# EAGLE board Rudder - Prototype 2 (EAGLE 7.2.0)
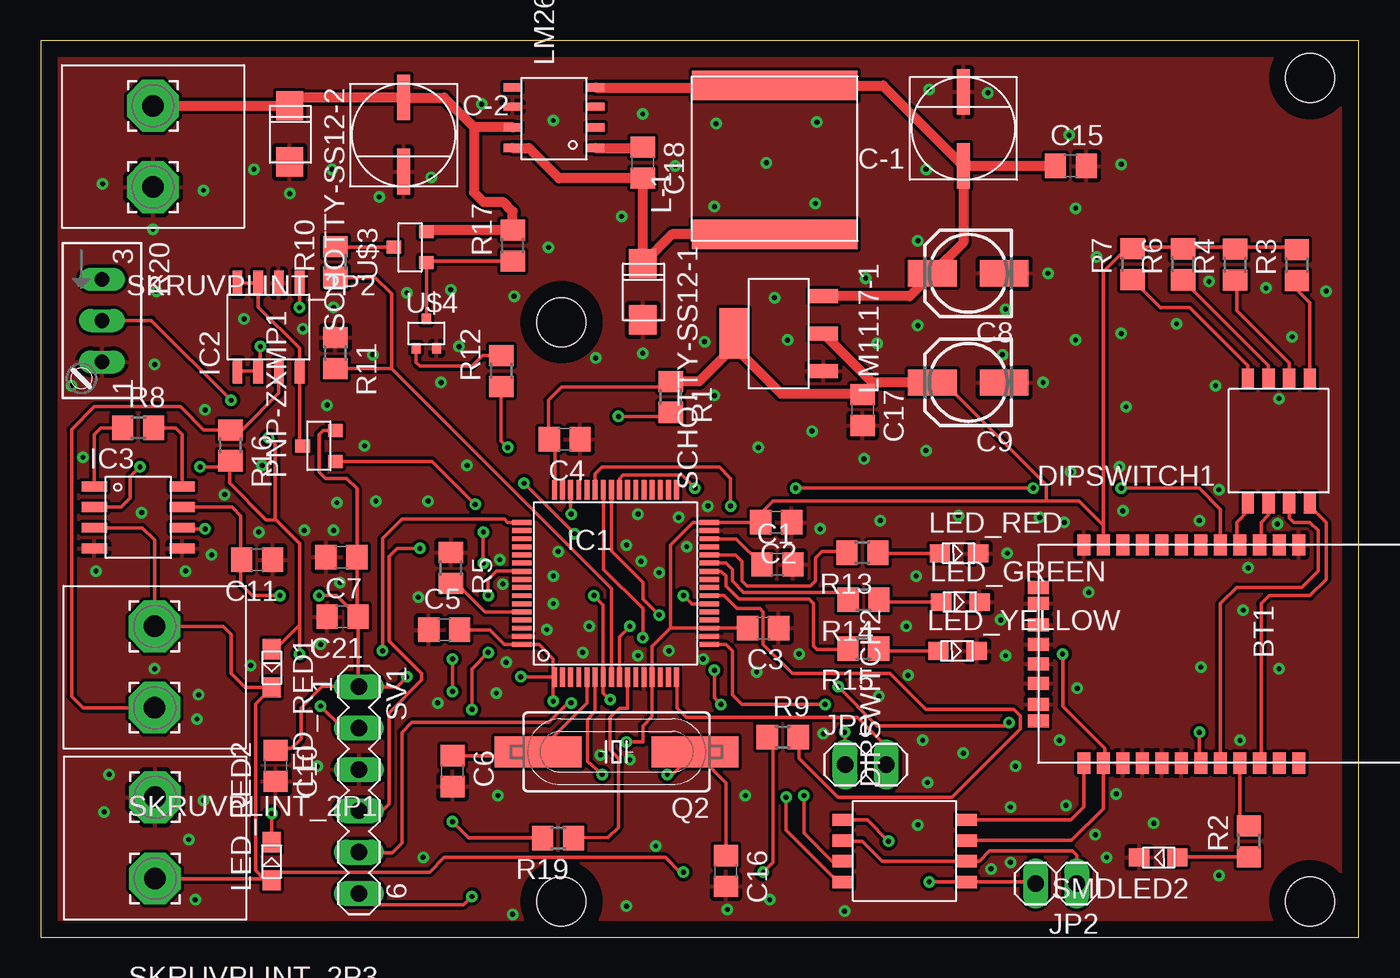
[diagram p0: board, top side]
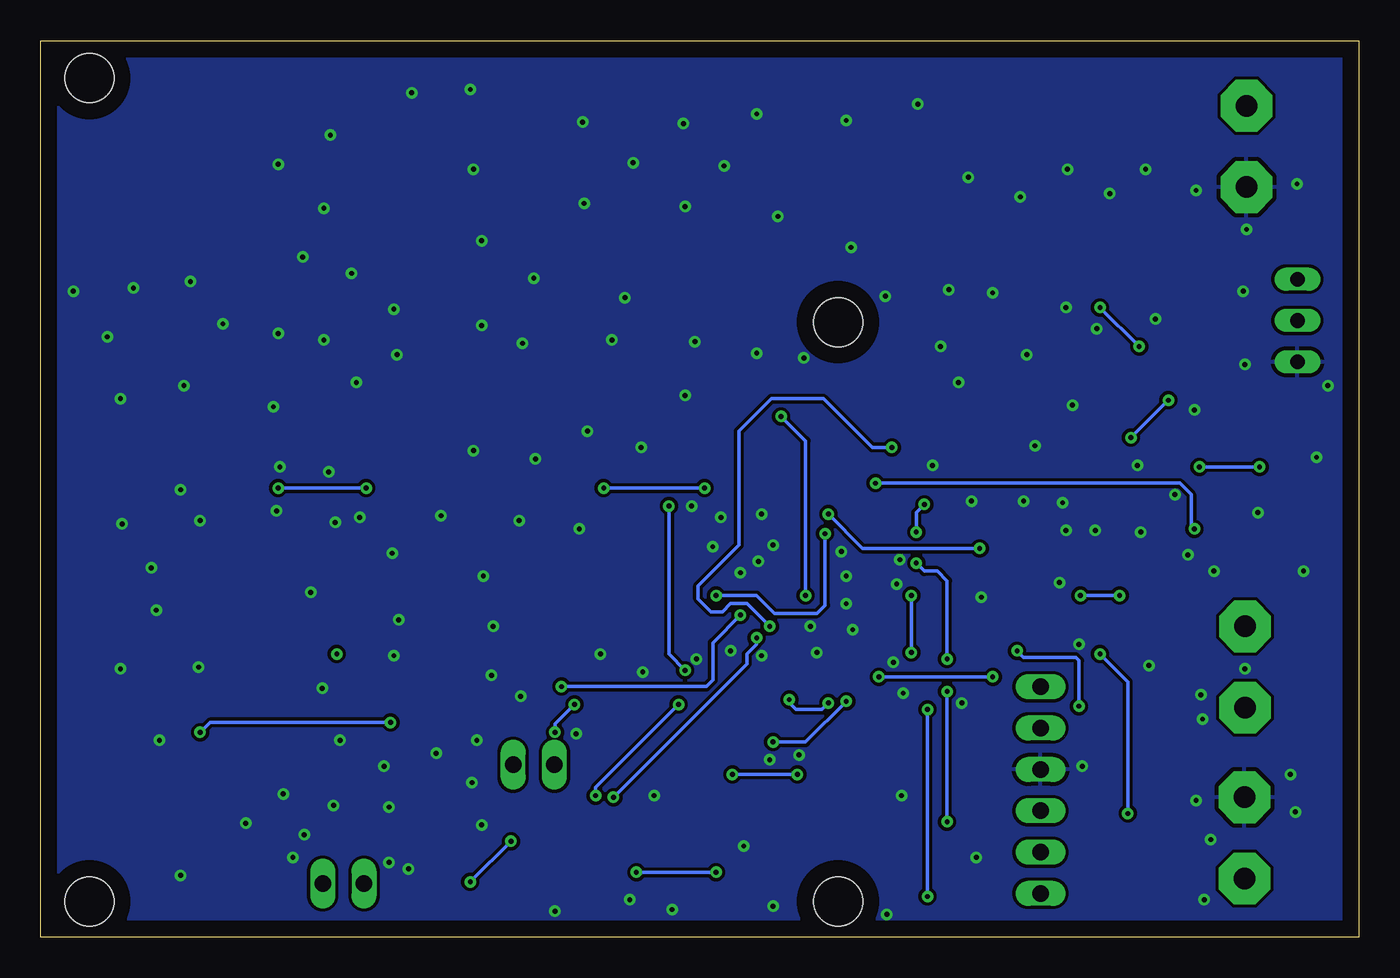
[diagram p1: board, bottom side, seen from below]

Size 81 x 55.1 mm. Coordinates in mm from the lower left corner, seen from the top.
Outline: 0,0 81,0 81,55.1 0,55.1 0,0
Copper layers (1*16): Top 0.035mm / dielectric 1.5mm / Bottom 0.035mm
Design rules "default *": minimum track width 0.2mm, minimum drill 0.3mm, track to track 0.2mm, track to pad 0.2mm, pad to pad 0.2mm, via to via 0.2mm, smd to smd 0mil, copper to edge 40mil, drill to drill 8mil, minimum pad ring 10mil, minimum via ring 8mil, stop-mask expansion 4mil, vias tented up to drill 0mil, thermal gap 10mil
Holes 3 mm at 78,2.2 78,52.8 32,37.8 32,2.2

## Footprints (pad centres in the part's own frame; a part is rotated, then mirrored left to right if it is on the bottom)
RN42 = smd 1.3 x 0.8: 1 -6.7,3.2; 2 -6.7,2; 3 -6.7,0.8; 4 -6.7,-0.4; 5 -6.7,-1.6; 6 -6.7,-2.8; 7 -6.7,-4; 8 -6.7,-5.2; 9 -6.7,-6.4; 10 -6.7,-7.6; 11 -6.7,-8.8; 12 -6.7,-10; 13 6.7,-10; 14 6.7,-8.8; 15 6.7,-7.6; 16 6.7,-6.4; 17 6.7,-5.2; 18 6.7,-4; 19 6.7,-2.8; 20 6.7,-1.6; 21 6.7,-0.4; 22 6.7,0.8; 23 6.7,2; 24 6.7,3.2 | smd 0.8 x 1.3: 28 3.1,-12.8; 29 -3.1,-12.8; 30 4.1,-12.8; 31 1.8,-12.8; 32 0.6,-12.8; 33 -0.6,-12.8; 34 -1.8,-12.8; 35 -4.1,-12.8
C0805 = smd 1.3 x 1.5: 1 -0.95,0; 2 0.95,0
153CLV-0505 = smd 3 x 1.6: + 2.2,0; - -2.2,0
CAP-6.3MM-DIA = smd 0.8 x 2.8: + 0,2.3; - 0,-2.25
DIPSWITCH4P = smd 0.76 x 1.27: B1 0,0; B2 1.27,0; B3 2.54,0; B4 3.81,0; T1 0,7.62; T2 1.27,7.62; T3 2.54,7.62; T4 3.81,7.62
LQFP64 = smd 0.3 x 1.2: 1 -3.75,-5.75; 2 -3.25,-5.75; 3 -2.75,-5.75; 4 -2.25,-5.75; 5 -1.75,-5.75; 6 -1.25,-5.75; 7 -0.75,-5.75; 8 -0.25,-5.75; 9 0.25,-5.75; 10 0.75,-5.75; 11 1.25,-5.75; 12 1.75,-5.75; 13 2.25,-5.75; 14 2.75,-5.75; 15 3.25,-5.75; 16 3.75,-5.75; 33 3.75,5.75; 34 3.25,5.75; 35 2.75,5.75; 36 2.25,5.75; 37 1.75,5.75; 38 1.25,5.75; 39 0.75,5.75; 40 0.25,5.75; 41 -0.25,5.75; 42 -0.75,5.75; 43 -1.25,5.75; 44 -1.75,5.75; 45 -2.25,5.75; 46 -2.75,5.75; 47 -3.25,5.75; 48 -3.75,5.75 | smd 1.2 x 0.3: 17 5.75,-3.75; 18 5.75,-3.25; 19 5.75,-2.75; 20 5.75,-2.25; 21 5.75,-1.75; 22 5.75,-1.25; 23 5.75,-0.75; 24 5.75,-0.25; 25 5.75,0.25; 26 5.75,0.75; 27 5.75,1.25; 28 5.75,1.75; 29 5.75,2.25; 30 5.75,2.75; 31 5.75,3.25; 32 5.75,3.75; 49 -5.75,3.75; 50 -5.75,3.25; 51 -5.75,2.75; 52 -5.75,2.25; 53 -5.75,1.75; 54 -5.75,1.25; 55 -5.75,0.75; 56 -5.75,0.25; 57 -5.75,-0.25; 58 -5.75,-0.75; 59 -5.75,-1.25; 60 -5.75,-1.75; 61 -5.75,-2.25; 62 -5.75,-2.75; 63 -5.75,-3.25; 64 -5.75,-3.75
SOIC(8) = smd 1.55 x 0.6: I1_HIGH 2.7,1.905; I1_LOW -2.7,1.905; I2_HIGH 2.7,0.635; I2_LOW -2.7,0.635; M_C -2.7,-0.635; M_I 2.7,-1.905; M_O -2.7,-1.905; SUBSTRATE 2.7,-0.635
S0-8 = smd 1.55 x 0.6: REF 2.7,-1.905; RG+ 2.7,1.905; RG- -2.7,1.905; V0 2.7,-0.635; V+ 2.7,0.635; V- -2.7,-1.905; VIN+ -2.7,-0.635; VIN- -2.7,0.635
1X02 = drill 1.016 long: 1 -1.27,0; 2 1.27,0
INDUCTOR = smd 1.8 x 10.16: 1 0,0; 2 9.14,0
SMD_LED_CUSTOM = smd 1.25 x 1.1: 1 0,0; 2 2.35,0
LM1117 = smd 0.84 x 1.8: ADJ/GND 0,0; INPUT 4.6,0; OUTPUT 2.3,0 | smd 3.1 x 1.8: OUTPUT2 2.3,5.5
LM2674 = smd 0.51 x 1.1: 1 0,0; 2 1.27,0; 3 2.54,0; 4 3.72,0; 5 3.72,5.1; 6 2.54,5.1; 7 1.27,5.1; 8 0,5.1
P-CHANNEL = smd 0.8 x 0.9: DRAIN 0,1; GATE -0.95,-1; SOURCE 0.95,-1
HC49UP = smd 5.334 x 1.93: 1 -4.826,0; 2 4.826,0
R0805 = smd 1.3 x 1.5: 1 -0.95,0; 2 0.95,0
S64W = drill 0.9 long: A 2.54,1.27; E -2.54,1.27; S 0,1.27
SCHOTTY = smd 1.8 x 1.68: + 3.46,0; - 0,0
SKRUVPLINT_2P = drill 1.321 pad 3.175 octagon: 3 0,5; 4 0,0
MA06-1 = drill 1.016 long: 1 -6.35,0; 2 -3.81,0; 3 -1.27,0; 4 1.27,0; 5 3.81,0; 6 6.35,0
SOT-323 = smd 0.559 x 0.648: DRAIN 0,0.895; GATE -0.623,-0.895; SOURCE 0.623,-0.895

## Placement (x,y rotation side)
BT1  BLUETOOTH-RN42  [RN42]  74.1,17.4 270 top
C1  4u7  [C0805]  45.27,22.91 0 top
C2  100n  [C0805]  45.2,25.5 180 top
C3  100n  [C0805]  44.4,19 180 top
C4  100n  [C0805]  32.2,30.6 180 top
C5  100n  [C0805]  24.8,18.9 0 top
C6  25p  [C0805]  25.31,10.21 270 top
C7  100n  [C0805]  18.48,23.36 180 top
C8  10u  [153CLV-0505]  57,40.8 180 top
C9  10u  [153CLV-0505]  57,34.1 180 top
C10  100n  [C0805]  14.44,10.53 270 top
C11  100n  [C0805]  13.3,23.2 180 top
C15  100n  [C0805]  63.3,47.4 0 top
C16  25p  [C0805]  42.11,4.07 270 top
C17  100n  [C0805]  50.5,32.4 270 top
C18  0.01uF  [C0805]  37,47.6 270 top
C21  1u  [C0805]  18.55,19.69 180 top
C-1  100uF  [CAP-6.3MM-DIA]  56.7,49.7 180 top
C-2  100uF  [CAP-6.3MM-DIA]  22.3,49.3 0 top
DIPSWITCH1  DIPSWITCH_4P  [DIPSWITCH4P]  77.99,34.31 180 top
DIPSWITCH2  DIPSWITCH_4P  [DIPSWITCH4P]  56.9,3.4 90 top
IC1  STM32F401RBT  [LQFP64]  35.32,21.74 0 top
IC2  REF200AU  [SOIC(8)]  14,37.5 90 top
IC3  INA122UA  [S0-8]  6,25.8 0 top
JP1  [1X02]  50.7,10.6 0 top
JP2  [1X02]  62.4,3.3 180 top
L-1  55uH  [INDUCTOR]  45.1,43.2 90 top
LED_GREEN  SMD_LED  [SMD_LED_CUSTOM]  55.34,20.59 0 top
LED_RED  SMD_LED  [SMD_LED_CUSTOM]  55.26,23.59 0 top
LED_RED1  SMD_LED  [SMD_LED_CUSTOM]  14.2,17.7 270 top
LED_RED2  SMD_LED  [SMD_LED_CUSTOM]  14.2,3.5 90 top
LED_YELLOW  SMD_LED  [SMD_LED_CUSTOM]  55.17,17.59 0 top
LM1117-1  LM1117  [LM1117]  48.1,34.8 90 top
LM2674-5V-BUCK1  LM2674-5VBUCK  [LM2674]  34.1,48.5 90 top
PNP-ZXMP1  BSH201  [P-CHANNEL]  17.1,30.2 90 top
Q2  18p  [HC49UP]  35.38,11.39 180 top
R1  10k  [R0805]  38.71,33.21 270 top
R2  220  [R0805]  74.24,5.89 90 top
R3  1k  [R0805]  77.19,41.31 90 top
R4  1k  [R0805]  73.39,41.33 90 top
R5  10k  [R0805]  25.21,22.69 270 top
R6  1k  [R0805]  70.19,41.35 90 top
R7  1k  [R0805]  67.09,41.37 90 top
R8  330  [R0805]  6,31.3 0 top
R9  100  [R0805]  45.6,12.3 0 top
R10  6.8k  [R0805]  18.1,41.5 90 top
R11  3.3k  [R0805]  18.1,35.9 270 top
R12  1k  [R0805]  28.3,34.8 90 top
R13  220  [R0805]  50.49,23.64 180 top
R14  220  [R0805]  50.57,20.74 180 top
R15  220  [R0805]  50.55,17.74 180 top
R16  350  [R0805]  11.66,30.23 270 top
R17  10k  [R0805]  29,42.5 90 top
R19  1k  [R0805]  31.8,6.1 180 top
R20  350  [S64W]  2.5,37.9 270 top
SCHOTTY-SS12-1  SCHOTTY-SS12  [SCHOTTY]  37,41.4 270 top
SCHOTTY-SS12-2  SCHOTTY-SS12  [SCHOTTY]  15.3,51.1 270 top
SKRUVPLINT_2P1  SKRUVPLINT_2P  [SKRUVPLINT_2P]  7,14.1 0 top
SKRUVPLINT_2P2  SKRUVPLINT_2P  [SKRUVPLINT_2P]  6.9,46.1 0 top
SKRUVPLINT_2P3  SKRUVPLINT_2P  [SKRUVPLINT_2P]  7.03,3.6 0 top
SMDLED2  SMD_LED  [SMD_LED_CUSTOM]  69.85,4.91 180 top
SV1  [MA06-1]  19.56,9.04 270 top
U$3  ZXMP10A13F  [P-CHANNEL]  22.7,42.4 90 top
U$4  SI1330EDL  [SOT-323]  23.7,37.1 0 top

## Library data of the parts
BT1 = RN42
C1-C11 C15-C18 C21 R1 R5 R8-R12 R16 R17 R19 = rcl
C-1 C-2 = panasonic-cap-100u
DIPSWITCH1 DIPSWITCH2 = dipswitch4p_updated
IC1 = E7020E
IC2 = REF200
IC3 = AIN122
JP1 JP2 = pinhead
L-1 = inductor-55u
LED_GREEN LED_RED LED_RED1 LED_RED2 LED_YELLOW SMDLED2 = greenled_smd
LM1117-1 = LM1117-3v3_vreg
LM2674-5V-BUCK1 = LM2674-5v-buck
PNP-ZXMP1 = BSH201
Q2 = crystal; OC_FARNELL: unknown; OC_NEWARK: unknown
R2-R4 R6 R7 R13-R15 = resistor
R20 = pot
SCHOTTY-SS12-1 SCHOTTY-SS12-2 = schotty-SS12
SKRUVPLINT_2P1-SKRUVPLINT_2P3 = skruvplint2p_CTB0700
SV1 = E7020E; OC_FARNELL: unknown; OC_NEWARK: unknown
U$3 = ZXMP10A13F
U$4 = SI1330EDL

## Nets
+3V3: BT1.11 C2.2 C3.2 C4.2 C5.2 C7.1 C9.+ C10.1 C11.2 C17.1 C21.1 IC1.1 IC1.13 IC1.19 IC1.32 IC1.48 IC1.64 IC3.V+ LM1117-1.OUTPUT LM1117-1.OUTPUT2 PNP-ZXMP1.SOURCE R1.1 R3.2 R4.2 R6.2 R7.2 SV1.1
+5V: C8.+ C15.1 C-1.+ L-1.2 LM1117-1.INPUT LM2674-5V-BUCK1.4
BAT_MEAS: IC1.8 R10.1 R11.2
BATMEAS_ON/OFF: IC1.9 R12.1
BATSUP: C-2.+ LM2674-5V-BUCK1.7 R17.2 SCHOTTY-SS12-2.- SKRUVPLINT_2P2.3 U$3.SOURCE
BT1_CONNSTAT: BT1.19 IC1.41
BT1_GPIO3: BT1.20 DIPSWITCH1.T2
BT1_GPIO4: BT1.22 DIPSWITCH1.T1
BT1_GPIO6: BT1.3 DIPSWITCH1.T3
BT1_GPIO7: BT1.4 DIPSWITCH1.T4
BT1_RESET: BT1.5 IC1.40
BT1_RX: BT1.14 DIPSWITCH2.B3
BT1_USART1_RX: DIPSWITCH2.T2 IC1.43
BT1_USART1_TX: DIPSWITCH2.T1 IC1.42
BT_TX: BT1.13 DIPSWITCH2.B4
GND: BT1.1 BT1.12 BT1.15 BT1.16 BT1.17 BT1.18 BT1.28 BT1.29 BT1.31 BT1.32 BT1.33 BT1.34 C1.2 C2.1 C3.1 C4.1 C5.1 C6.2 C7.2 C8.- C9.- C10.2 C11.1 C15.2 C16.2 C17.2 C21.2 C-1.- C-2.- IC1.12 IC1.18 IC1.31 IC1.47 IC1.63 IC2.SUBSTRATE IC3.REF IC3.V- LED_GREEN.2 LED_RED.2 LED_YELLOW.2 LM1117-1.ADJ/GND LM2674-5V-BUCK1.6 R5.1 R11.1 R20.A SCHOTTY-SS12-1.+ SCHOTTY-SS12-2.+ SKRUVPLINT_2P2.4 SKRUVPLINT_2P3.3 SMDLED2.2 SV1.3 U$4.SOURCE
LED_GREEN: IC1.27 R14.2
LED_RED: IC1.28 R13.2
LED_YELLOW: IC1.26 R15.2
N$1: C1.1 IC1.30
N$2: IC1.60 R5.2
N$3: LED_RED.1 R13.1
N$4: BT1.21 R2.2
N$5: DIPSWITCH1.B1 R3.1
N$6: DIPSWITCH1.B2 R4.1
N$7: DIPSWITCH1.B3 R6.1
N$8: C6.1 IC1.5 Q2.2
N$9: C16.1 IC1.6 Q2.1
N$10: DIPSWITCH1.B4 R7.1
N$11: R2.1 SMDLED2.1
N$12: IC2.I1_HIGH IC2.I2_HIGH IC2.M_O PNP-ZXMP1.DRAIN
N$13: IC3.RG- R8.1
N$14: IC3.RG+ R8.2
N$15: C18.1 LM2674-5V-BUCK1.1
N$16: LED_GREEN.1 R14.1
N$17: LED_YELLOW.1 R15.1
N$19: PNP-ZXMP1.GATE R19.2
N$20: IC2.M_C R16.1 SKRUVPLINT_2P1.4
N$21: R10.2 U$3.DRAIN
N$22: IC2.I1_LOW IC2.I2_LOW IC2.M_I
N$23: R12.2 U$4.GATE
N$24: R17.1 U$3.GATE U$4.DRAIN
NRST: IC1.7 R1.2 SV1.5
PIN_RX: DIPSWITCH2.B2 DIPSWITCH2.T3 JP2.1
PIN_TX: DIPSWITCH2.B1 DIPSWITCH2.T4 JP2.2
STRAIN_ADC1: IC1.22 IC3.V0
STRAIN_ON/OFF: IC1.10 R19.1
STRAIN_OPEN/SHORT_DETECTION: IC1.23 R9.2
SWCLK: IC1.49 SV1.2
SWDIO: IC1.46 SV1.4
SWO: IC1.55 SV1.6
UART2_RX: IC1.17 JP1.1
UART2_TX: IC1.16 JP1.2
VIN+: IC3.VIN+ LED_RED1.2 LED_RED2.1 R9.1 SKRUVPLINT_2P1.3 SKRUVPLINT_2P3.4
VIN-: IC3.VIN- LED_RED1.1 LED_RED2.2 R16.2 R20.S
VOUT: C18.2 L-1.1 LM2674-5V-BUCK1.8 SCHOTTY-SS12-1.-

## Tracks (layer width: path | path; a pad name or v marks a point on that pad's centre or on a via)
+3V3  (via drill 0.3)
  Top 0.2: 19.43,19.76 C7.1 19.43,27.57 18.8,28.2 17.5,28.2 17.1,28.6 17.1,30.9 17.35,31.15 PNP-ZXMP1.SOURCE | SV1.1 19.5,15.45 C21.1 18.19,21 v17.1,21 | v29.5,16 v29.51,15.99 IC1.1 | v36,12 37,12 37,13 37.57,13.57 IC1.13 37.57,17.87 38.7,19 | v31.5,14.5 31.5,15.92 IC1.1 | SV1.1 21.89,15.39 v22.5,16 | IC1.48 31.6,27.52 31.6,30.2 31.25,30.55 C4.2 31.2,30.65 31.2,33 32,33.8 38.1,33.8 38.53,34.23 38.53,34.34 | C5.2 27.6,18.9 28.51,17.99 IC1.64 30.61,17.99 31.5,17.1 31.5,16.06 IC1.1 | C3.2 IC1.19 | IC1.19 | IC1.19 38.7,19 | 67.11,42.3 67,42.2 | 67,42.2 66.91,42.1 66.5,42.1 65.3,40.9 65.3,25.3 | 65.3,25.3 BT1.11 | 61.8,26.8 45,26.8 44.3,26.1 44.5,26.1 44.5,25.75 C2.2 IC1.32 40.09,25.49 38.7,24.1 38.7,19 | IC3.V+ 11.77,26.43 12.3,25.9 12.3,23.25 | 12.3,23.25 C11.2 | SV1.1 17.3,15.4 16,14.1 16,12.2 15.4,11.6 14.6,11.6 C10.1 | 12.3,23.25 12.3,21.7 13,21 v14.7,21 | 67,42.2 R7.2 67.2,42.4 70,42.4 R6.2 70.2,42.4 73.2,42.4 R4.2 73.4,42.4 77,42.4 R3.2 | 61.8,26.8 61.8,27.8 55.6,34 55,34 C9.+ | 61.8,26.8 63.8,26.8 65.3,25.3
  Top 0.4: 38.68,34.19 R1.1 38.53,34.34 | 19.46,23.39 C7.1 | 19.43,19.76 C21.1
  Top 0.6: C9.+ 51.25,34.1 | 51.25,34.1 C17.1 50.45,33.4 45.5,33.4 42.6,36.3 | 38.85,34.3 R1.1 40.46,34.16 42.6,36.3 | LM1117-1.OUTPUT 51.1,34.1 51.25,34.1 | LM1117-1.OUTPUT2 42.6,36.3
  Bottom 0.2: v22.5,16 v29.5,16 | v36,12 34,12 v31.5,14.5 | v14.7,21 v17.1,21
+5V
  Top 0.6: LM2674-5V-BUCK1.4 40.62,52.22 40.8,52.4 | 40.8,52.4 41,52.6 | 40.8,52.4 40.86,52.34 L-1.2 51.76,52.34 C-1.+ | C15.1 C-1.+ | C-1.+ 56.7,42.7 C8.+ 53.4,39.4 LM1117-1.INPUT
BAT_MEAS
  Top 0.2: IC1.8 35.07,21.43 21.55,34.95 | R11.2 21.55,34.95 | R10.1 20.55,40.55 21.55,39.55 21.55,34.95
BATMEAS_ON/OFF  (via drill 0.3)
  Top 0.2: IC1.9 35.57,18.47 v36.2,19.1 | v28.7,30.1 28.3,30.5 R12.1
  Bottom 0.2: v36.2,19.1 37.6,20.5 38.6,20.5 39.1,20 39.8,20 40.6,20.8 40.6,21.6 38.1,24.1 38.1,31.1 36.1,33.1 32.9,33.1 29.9,30.1 v28.7,30.1
BATSUP
  Top 0.6: SKRUVPLINT_2P2.3 SCHOTTY-SS12-2.- 15.8,51.6 C-2.+ 24.8,51.6 26.63,49.77 | LM2674-5V-BUCK1.7 26.63,49.77 | U$3.SOURCE 23.8,43.45 R17.2 29,44.6 28.4,45.2 27.2,45.2 26.63,45.77 26.63,49.77
BT1_CONNSTAT  (via drill 0.3)
  Top 0.2: IC1.41 35.07,23.73 37,21.8 37,20.8 v38,19.8 | v49,15.4 51.4,13 59.3,13 v59.5,13.2 | v71.2,12.6 71.2,10.8 BT1.19
  Bottom 0.2: v59.5,13.2 70.6,13.2 v71.2,12.6 | v38,19.8 39.7,18.1 39.7,15.8 40.1,15.4 v49,15.4
BT1_GPIO3
  Top 0.2: BT1.20 72.5,20.5 73.5,21.5 77.5,21.5 78.5,22.5 78.5,25 78,25.5 77,25.5 76.72,25.78 DIPSWITCH1.T2
BT1_GPIO4
  Top 0.2: BT1.22 75,10.8 75,20.5 75.5,21 78,21 79,22 79,25.5 77.99,26.51 DIPSWITCH1.T1
BT1_GPIO6
  Top 0.2: DIPSWITCH1.T3 75.45,25.95 75,25.5 75,24.2 BT1.3
BT1_GPIO7
  Top 0.2: DIPSWITCH1.T4 74.18,26.18 73.5,25.5 73.5,24.3 BT1.4
BT1_RESET  (via drill 0.3)
  Top 0.2: BT1.5 72.5,26.3 71.2,27.6 v66.4,27.6 | v61,27.6 v46.4,27.6 | v40.2,27.6 39.4,28.4 35.8,28.4 35.57,28.17 IC1.40
  Bottom 0.2: v66.4,27.6 v61,27.6 | v46.4,27.6 v40.2,27.6
BT1_RX  (via drill 0.3)
  Top 0.2: v62.8,17.4 62.8,14.2 65.4,11.6 65.4,10.8 BT1.14 65.3,7.9 63.34,5.94 DIPSWITCH2.B3
BT1_USART1_RX  (via drill 0.3)
  Top 0.2: IC1.43 34.07,28.47 34.5,28.9 41.7,28.9 42.4,28.2 v42.4,26.5 | v41.4,16.4 41.4,14.7 v41.8,14.3 | DIPSWITCH2.T2 48.63,4.67 46.9,6.4 v46.9,8.7
  Bottom 0.2: v42.4,26.5 42.4,17.4 v41.4,16.4 | v46.9,8.7 46.9,9.2 v41.8,14.3
BT1_USART1_TX  (via drill 0.3)
  Top 0.2: v37,18.4 37,20.2 34.6,22.6 34.6,27.4 IC1.42 | v45.8,8.6 45.8,6.6 49,3.4 DIPSWITCH2.T1
  Bottom 0.2: v37,18.4 37,18 37.6,17.4 37.6,16.8 v45.8,8.6
BT_TX
  Top 0.2: DIPSWITCH2.B4 63.31,7.21 64.1,8 BT1.13
GND  (via drill 0.3)
  Top 0.2: IC1.12 37.07,15.93 37.1,15.9
  other vias: 59.3,17.3 17.2,18 29,1.4 44.8,2.3 43.3,8.7 59,19.5 59.4,23.6 65.5,4.9 59.9,10.5 34.4,11.2 36.2,10.9 71.8,40.3 75.3,39.9 66.4,37.1 44.1,30.1 51.6,25.6 54.4,29.9 56.4,25.9 61.4,25.8 63.3,28.6 66.5,26.2 72.4,27.5 66.3,28.9 76,25.4 71.2,25.6 74.2,22.7 73.9,20.1 73.7,12.1 72.4,3.8 71.3,16.6 76.1,16.5 9.1,6 37.8,5.6 36,1.9 46.6,17.4 9.5,2.3 23.5,4.9 28.1,8.7 69.8,37.7 64.9,41.8 79,39.7 53.3,16.1 53.2,19.1 53.8,22.2 68.4,7 24.4,14.4 28,15 28.6,16.9 47.9,25.1 41.4,33.3 72.2,33.9 76.1,33.1 76.9,36.9 64.4,21.2 63.7,15.3 4.2,10 49.4,1.6 38.6,17.6 36.7,17.3 33.3,17.5 40.7,17.1 38,22.4 39.2,25.8 36.7,26 31.8,23.7 31.5,22.2 31.5,20.5 31.1,18.9 33.7,19.1 36.9,23.1 39.7,24 36,24.1 41,26.5 12.5,38 1.9,33.9 15.3,45.7 20.8,45.5 27.1,51.2 10,45.9 58.2,51.9 54.6,52.1 66.4,47.5 61.9,40.8 61.6,34.1 59.3,38.6 59.1,35.8 51.4,36.5 50.7,40.5 40.8,36.6 45.9,36.7 62.9,25.5 37,35.9 34.1,35.6 24,46.7 22.5,39.6 18,38.7 25.2,39.8 24.6,34.1 25.7,36.3 16.1,37.4 17.9,47.2 13.1,47.2 18.2,26.7 8.9,22.5 3.4,22.5 10,8.4 3.9,7.7 9.6,13.4 9.7,14.9 7,16.5 42.2,1.7 13.4,24.9 18,25 18.4,21.8 41.5,50 47.7,50.1 41.4,44.9 47.6,45.1 44.6,47.6 39,47.4 37,50.6 29.1,39.4 31.2,42.4 7.1,39.7 62.6,12.1 59.6,8 66.7,32.6 63.6,36.7 63.6,44.8 63.2,49.3 54.4,47.2 53.9,42.8 53.9,37.6 26.2,29 19.9,30.2 20.4,35.8 17.6,32.7 13.6,29 10.1,32.4 2.6,29.5 6.2,26.1 11.3,27.2 12.9,16.7 10.5,23.5 16.2,25 20.6,26.8 23.8,26.8 54.5,9.5 56.7,11.3 54.2,12.1 51.5,14.8 44,16.3 48.1,12.5 63,8.1 64.8,6.3 66.1,8.8 58.4,4.2 59.6,4.6 28.4,21.7 28.2,23.2 31.5,50.2 35.7,44.3 45.1,39.3 50.6,29.4 53.9,6.9 17,10.5 23.2,20.9 7,35.2 3.8,46.3 6.9,43.5 47.4,31.1
  pour Top: 0,55 81,55 81,0 0,0
  pour Bottom: 0,55 81,55 81,0 0,0
LED_GREEN
  Top 0.2: R14.2 arc90 49.16,21.2 43.2,21.2 42.5,21.9 42.5,22.6 42.1,23 IC1.27
LED_RED
  Top 0.2: R13.2 49.48,23.7 48,23.7 47.6,23.3 47.6,21.9 47.3,21.6 43.4,21.6 43.1,21.9 43.1,23.1 42.7,23.5 IC1.28
LED_YELLOW
  Top 0.2: IC1.26 41.81,22.49 42.1,22.2 42.1,21.6 42.9,20.8 47.2,20.8 47.5,20.5 47.5,17.9 47.7,17.7 49.56,17.7 R15.2
N$1
  Top 0.2: C1.1 42.74,24.49 IC1.30
N$2
  Top 0.2: IC1.60 27.3,20 25.56,21.74 R5.2
N$3
  Top 0.2: LED_RED.1 51.49,23.59
  Top 0.4: 51.49,23.59 R13.1
N$4
  Top 0.2: BT1.21 73.7,7.38 R2.2
N$5
  Top 0.2: R3.1 77.19,39.81 78,39 DIPSWITCH1.B1
N$6
  Top 0.2: DIPSWITCH1.B2 76.72,35.28 73.5,38.5 73.5,40.27 R4.1
N$7
  Top 0.2: DIPSWITCH1.B3 75.45,35.14 R6.1
N$8
  Top 0.2: C6.1 30.32,11.16 | IC1.5 33.57,14.41 Q2.2
  Top 0.4: 30.32,11.16 Q2.2
N$9  (via drill 0.3)
  Top 0.2: C16.1 42.11,9.49 Q2.1 38.82,10 v38.5,10 | IC1.6 34.07,13.87 33.6,13.4 33.6,10.8 v34.5,10
  Bottom 0.2: v34.5,10 v38.5,10
N$10
  Top 0.2: DIPSWITCH1.B4 74.18,35.12 70.6,38.7 68.81,38.7 R7.1
N$11
  Top 0.2: R2.1 69.88,4.94
  Top 0.4: 69.88,4.94 SMDLED2.1
N$12
  Top 0.2: IC2.I1_HIGH IC2.I2_HIGH 13.37,38.73 15.9,36.2 IC2.M_O 15.9,30.39 16.1,30.39 PNP-ZXMP1.DRAIN
N$13
  Top 0.2: IC3.RG- 3.3,30.9 3.7,31.3 R8.1
N$14
  Top 0.2: IC3.RG+ 8.7,30.9 8.3,31.3 R8.2
N$15
  Top 0.6: LM2674-5V-BUCK1.1 36.95,48.5 C18.1
N$16
  Top 0.2: LED_GREEN.1 51.67,20.59
  Top 0.4: 51.67,20.59 R14.1
N$17
  Top 0.2: 51.65,17.59 LED_YELLOW.1
  Top 0.4: 51.65,17.59 R15.1
N$19  (via drill 0.3)
  Top 0.2: R19.2 26.3,6.1 v25.3,7.1 | v25.3,15.1 v25.3,17.1 | v27.2,23 v27.2,24.9 | v26.7,26.6 24.05,29.25 PNP-ZXMP1.GATE
  Bottom 0.2: v25.3,7.1 v25.3,15.1 | v25.3,17.1 25.3,21.9 25.9,22.5 26.7,22.5 v27.2,23 | v27.2,24.9 27.2,26.1 v26.7,26.6
N$20
  Top 0.2: SKRUVPLINT_2P1.4 2.6,14.1 1.9,14.8 1.9,31.2 3.3,32.6 8.6,32.6 10.02,31.18 R16.1 12.38,31.18 14.63,33.44 IC2.M_C
N$21
  Top 0.2: U$3.DRAIN 18.15,42.4 R10.2
N$22  (via drill 0.3)
  Top 0.2: IC2.M_I v15.9,38.7 | v13.5,36.3 13.5,34.94 IC2.I2_LOW IC2.I1_LOW
  Bottom 0.2: v15.9,38.7 v13.5,36.3
N$23
  Top 0.2: R12.2 27.15,35.75 26.5,35.1 23.3,35.1 23.08,35.32 U$4.GATE
N$24
  Top 0.2: R17.1 23.8,41.55 U$3.GATE U$4.DRAIN
NRST  (via drill 0.3)
  Top 0.2: v34,21 34.57,20.43 IC1.7 34.57,15.03 v35,14.6 | v35.5,32 38.45,32 R1.2 | v32.6,14.4 32.4,14.4 31.2,13.2 22.8,13.2 22.2,12.6 22.2,5.8 21.6,5.2 19.59,5.2 SV1.5
  Bottom 0.2: v34,21 34,30.5 v35.5,32 | v35,14.6 35,14.4 34.6,14 33,14 v32.6,14.4
PIN_RX
  Top 0.2: JP2.1 63.67,5.03 63.4,5.3 58.3,5.3 57.67,4.67 DIPSWITCH2.B2 51.73,4.67 50.5,5.9 49.32,5.9 DIPSWITCH2.T3
PIN_TX  (via drill 0.3)
  Top 0.2: JP2.2 61.03,3.4 DIPSWITCH2.B1 v54.6,3.4 | DIPSWITCH2.T4 50.79,7.21 v52.1,5.9
  Bottom 0.2: v52.1,5.9 v54.6,3.4
STRAIN_ADC1  (via drill 0.3)
  Top 0.2: IC1.22 40.01,20.49 v39.5,21 | v32.8,24.8 v29.7,27.9 | v10.1,25.1 8.77,25.1 IC3.V0
  Bottom 0.2: v39.5,21 37,21 35.9,19.9 33.3,19.9 32.8,20.4 v32.8,24.8 | v29.7,27.9 11,27.9 10.3,27.2 10.3,25.3 v10.1,25.1
STRAIN_ON/OFF
  Top 0.2: IC1.10 36.07,14.07 35.57,14.07 35,13.5 35,11.5 35.5,11 35.5,6.76 34.87,6.13 R19.1
STRAIN_OPEN/SHORT_DETECTION
  Top 0.2: IC1.23 41.2,21 42,21 42.8,20.2 44.2,20.2 44.4,20 44.4,18 46.2,16.2 52.2,16.2 54.4,14 59.8,14 60.2,13.6 60.2,12.8 56,8.6 49,8.6 46.6,11 46.6,12.2 R9.2
SWCLK  (via drill 0.3)
  Top 0.2: 19.85,12.85 SV1.2 18.55,12.85 v17.2,14.2 | v21,17.6 21,24.5 22.2,25.7 28.5,25.7 28.7,25.5 IC1.49
  Bottom 0.2: v17.2,14.2 17.2,17 17.4,17.2 20.6,17.2 v21,17.6
SWDIO  (via drill 0.3)
  Top 0.2: IC1.46 32.57,26.03 v32.6,26 | v23.3,23.9 21.9,23.9 21.4,23.4 21.4,18.2 23.4,16.2 23.4,15.8 21.4,13.8 21.4,8.2 21,7.8 19.59,7.8 SV1.4
  Bottom 0.2: v32.6,26 30.5,23.9 v23.3,23.9
SWO  (via drill 0.3)
  Top 0.2: SV1.6 19.81,2.69 20.5,2 26,2 v26.5,2.5 | v26.5,14 26.5,16.5 v27.5,17.5 | v27.5,21 27.5,22 28,22.5 IC1.55
  Bottom 0.2: v26.5,2.5 v26.5,14 | v27.5,17.5 v27.5,21
UART2_RX  (via drill 0.3)
  Top 0.2: v48.2,14.3 43.1,14.3 42.5,14.9 42.5,17.6 42.11,17.99 IC1.17 | JP1.1 49.43,12.57 v49.4,12.6
  Bottom 0.2: v48.2,14.3 49.4,13.1 v49.4,12.6
UART2_TX
  Top 0.2: JP1.2 51.97,11.73 50.2,13.5 39.7,13.5 39.1,14.1 39.1,15.96 IC1.16
VIN+  (via drill 0.3)
  Top 0.2: IC3.VIN+ 6.24,25.16 7,24.4 SKRUVPLINT_2P1.3 11.2,19.1 11.7,18.6 11.7,16.2 12.55,15.35 LED_RED1.2 13.2,14.35 13.2,4.1 13.7,3.6 | SKRUVPLINT_2P3.4 13.7,3.6 | 13.7,3.6 14.1,3.6 LED_RED2.1 14.7,4 23.9,4 24.8,4.9 38.4,4.9 39.3,4 v39.5,4 | R9.1 44.65,12.05 45,11.7 45,4.6 v44.4,4
  Bottom 0.2: v44.4,4 v39.5,4
VIN-  (via drill 0.3)
  Top 0.2: IC3.VIN- 4.93,26.43 5.5,27 5.5,28.3 v6.1,28.9 | v9.8,28.9 11.28,28.9 | 11.28,28.9 R16.2 | 11.28,28.9 11.5,28.9 11.6,28.8 11.6,27.9 13.86,25.64 14.4,25.64 | LED_RED1.1 14.4,17.7 15.9,19.2 | 15.9,19.2 15.9,24.2 14.46,25.64 14.4,25.64 | LED_RED2.2 v14.2,7.6 | v15.9,17.4 15.9,19.2 | R20.S 6.8,37.9 v11.7,33 | v14,30.7 14.4,30.3 14.4,25.64
  Bottom 0.2: v6.1,28.9 v9.8,28.9 | v14.2,7.6 14.2,15.7 v15.9,17.4 | v11.7,33 v14,30.7
VOUT
  Top 0.6: LM2674-5V-BUCK1.8 30,48.5 31.85,46.65 C18.2 SCHOTTY-SS12-1.- 38.8,43.2 L-1.1